# Altium PCB Rf reciever.PcbDoc
Units mm, origin at the board's own origin, x right, y up, seen from the top; angles counter-clockwise.
Board outline 39.24 x 33.15 mm, 2 copper layers (Top Layer, Bottom Layer); 13 components, 14 nets, 49 pads, 0 vias.
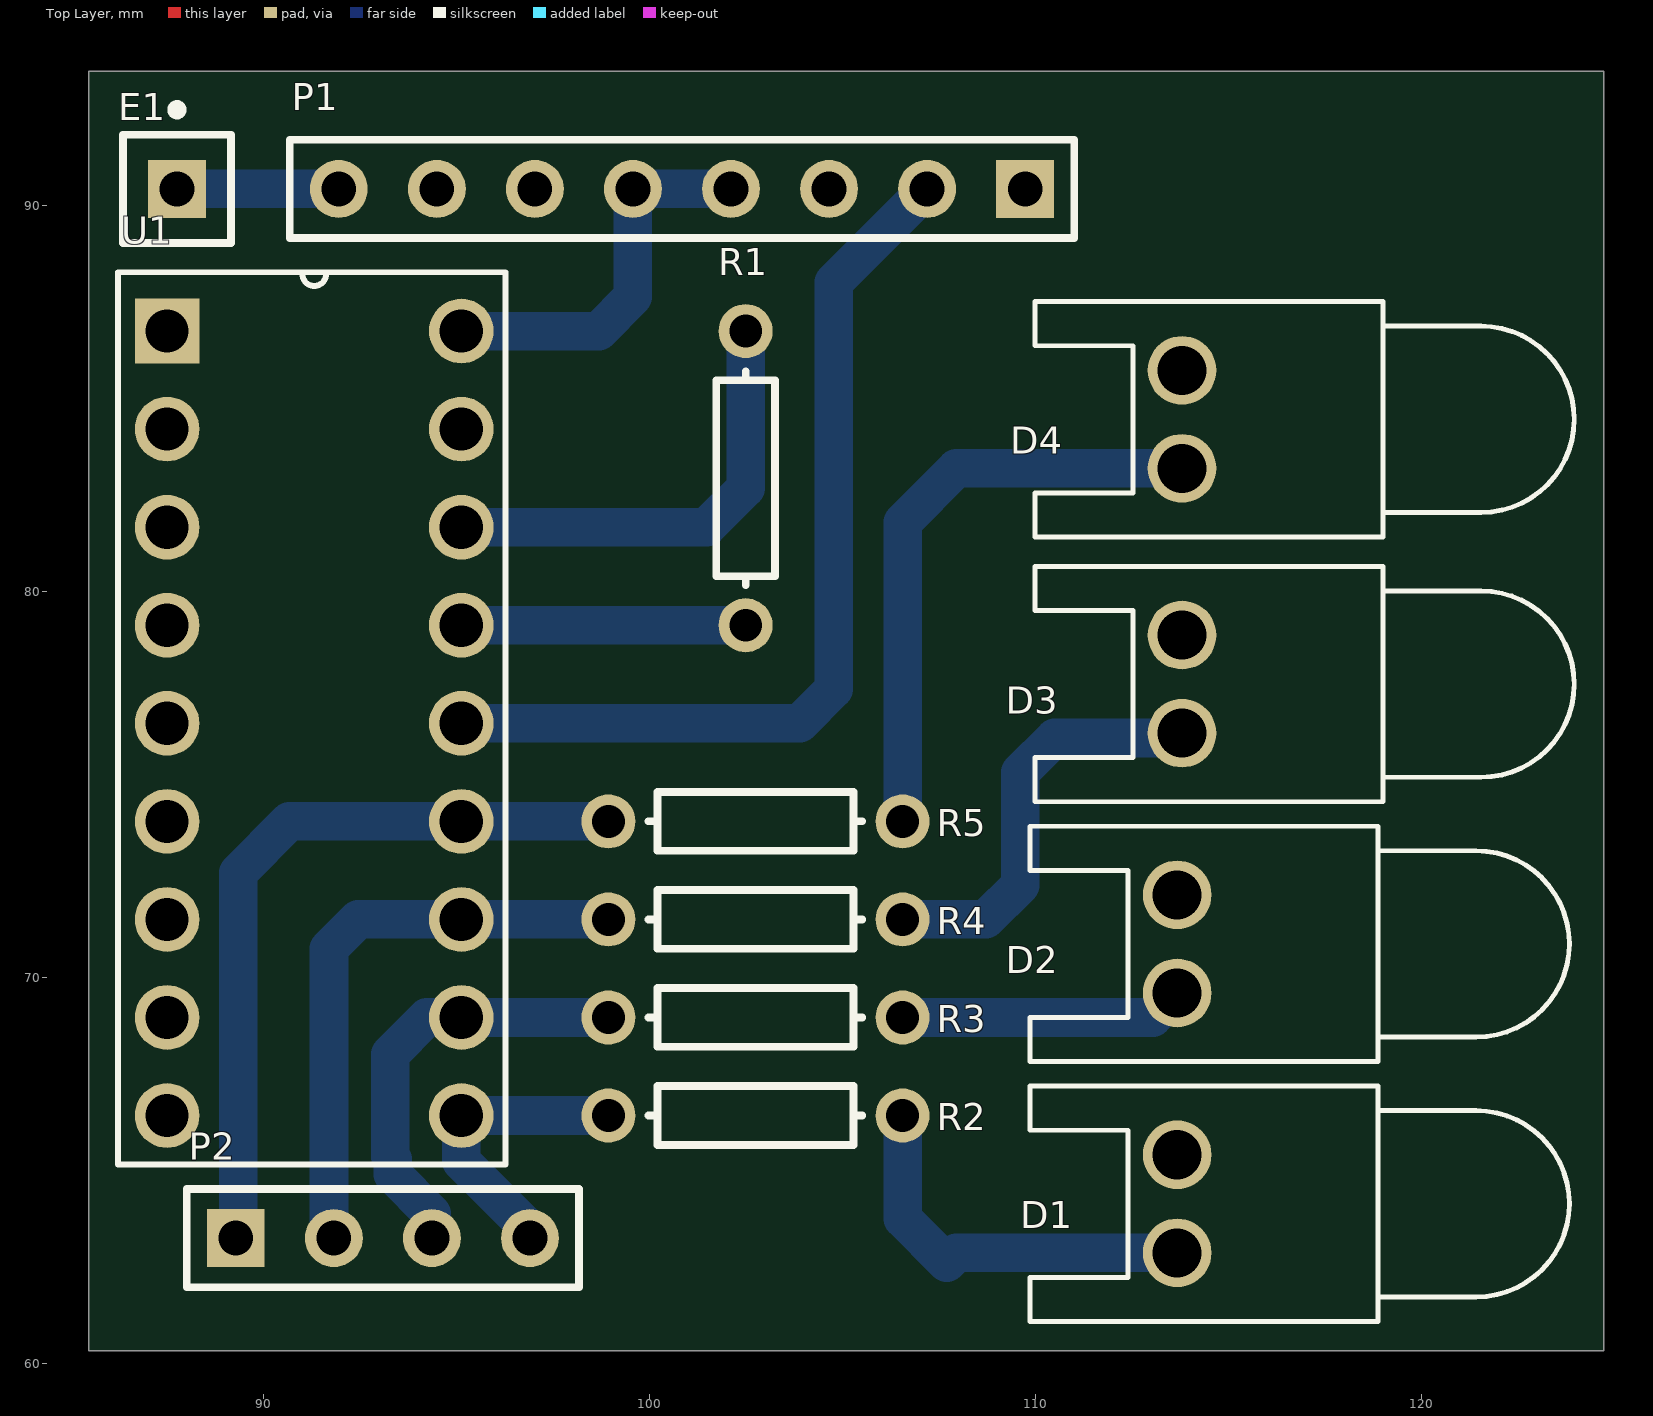
[diagram p0: Top Layer view]
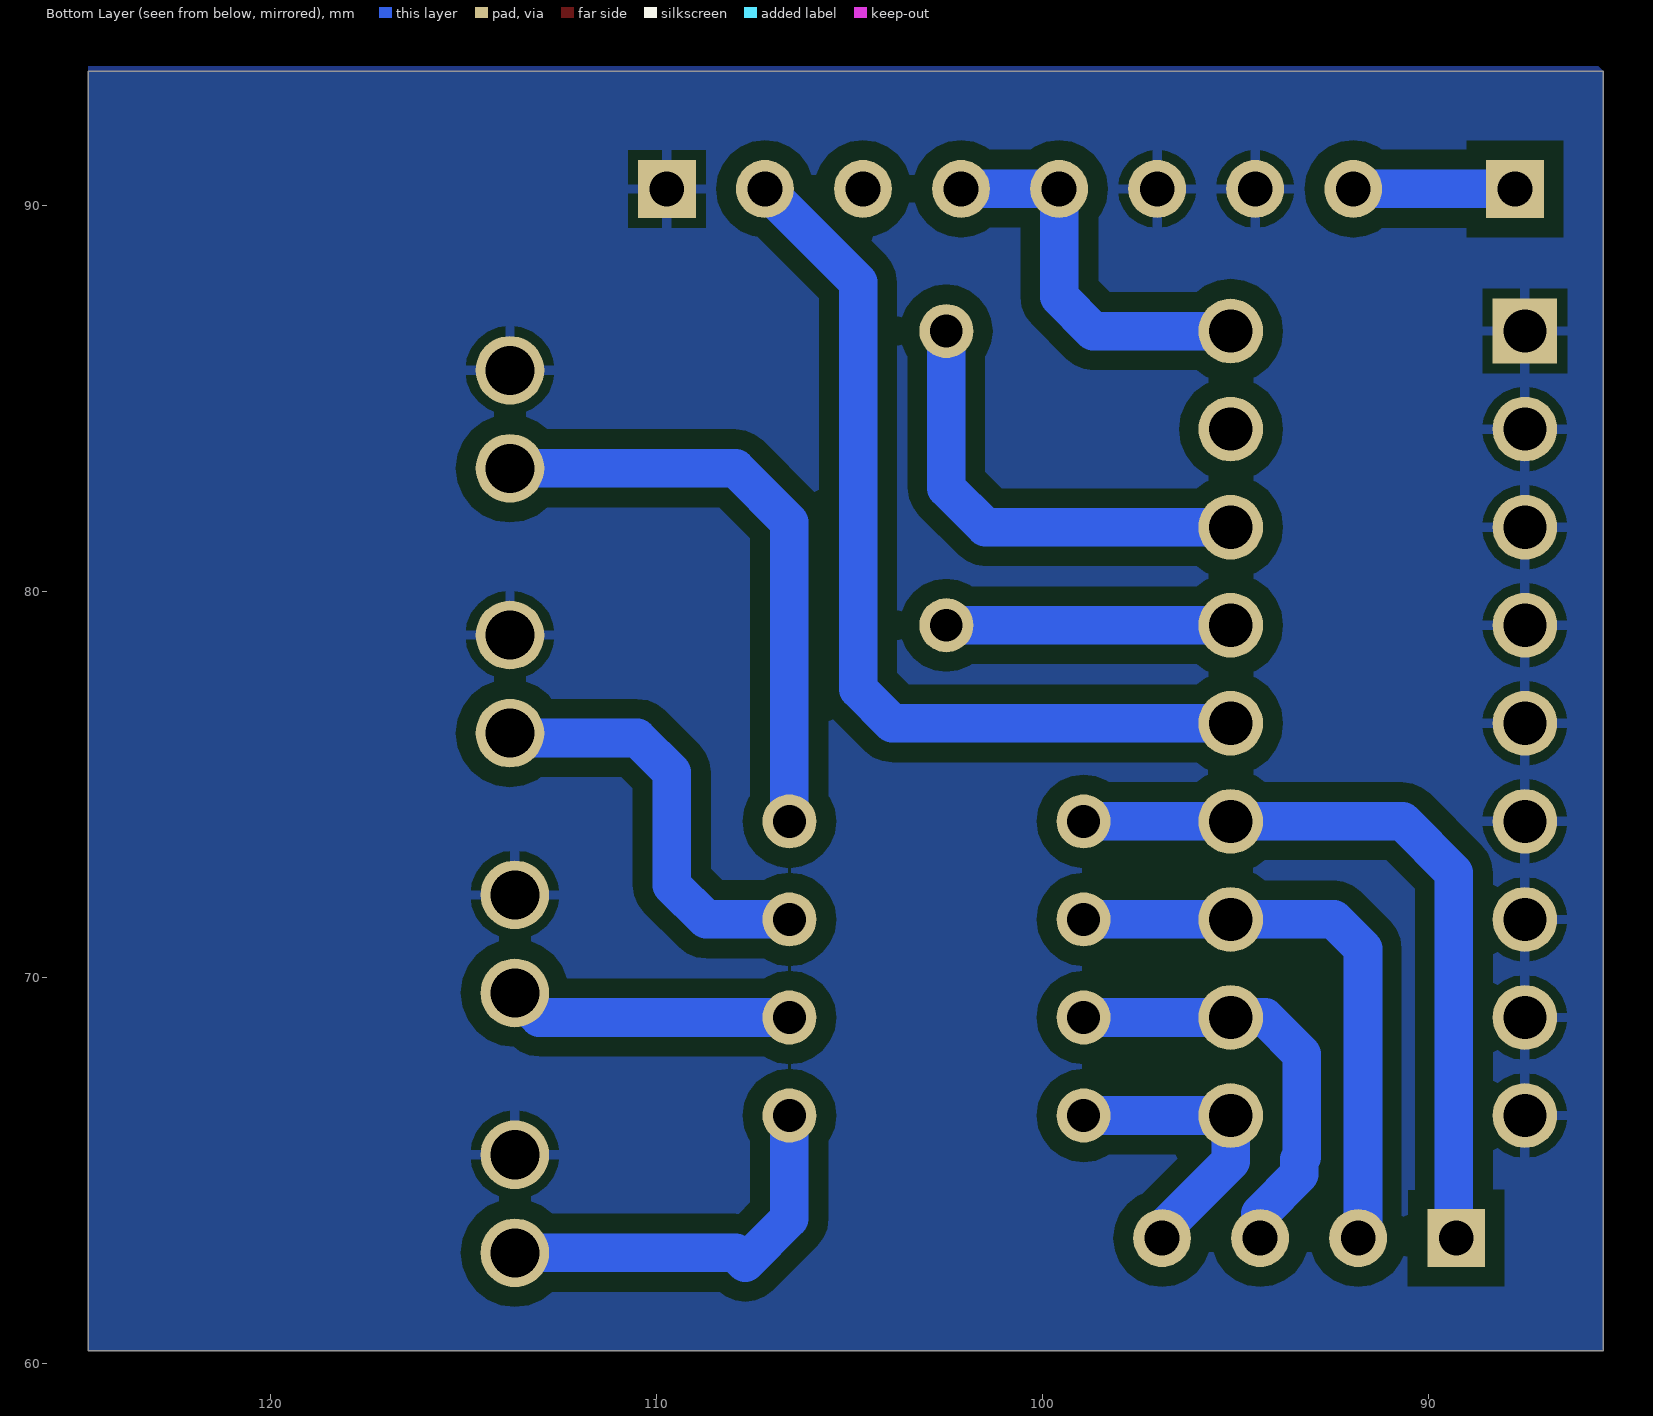
[diagram p1: Bottom Layer view, seen from below]

## Layer stack, top to bottom
Top Solder: solder mask 0.0102, Solder Resist, Dk 3.5
Top Layer: signal copper 0.0356
Dielectric 1: dielectric 0.32, FR-4, Dk 4.8
Bottom Layer: signal copper 0.0356
Bottom Solder: solder mask 0.0102, Solder Resist, Dk 3.5

## Board outline
124.714,93.472 124.714,60.325 85.471,60.325 85.471,93.472

## Design rules (kind name [scope] priority, off if disabled: settings)
Clearance [All] p1: gap=0.5 ignorepadtopadclearanceinfootprint=FALSE
PolygonConnect [All] p1: connectstyle=Relief reliefconductorwidth=0.254 reliefentries=4 polygonreliefangle="90 Angle" airgapwidth=0.254
RoutingVias [All] p1: holewidth=0.711 width=1.27 viastyle="Through Hole" minholewidth=0.711 minwidth=1.27 maxholewidth=0.711 maxwidth=1.27
SolderMaskExpansion [All] p1: expansion=0.102
Width [All] p1: maxlimit=2 minlimit=2539.975 preferedwidth=1 toplayer_minwidth=0 bottomlayer_minwidth=0
30 further rules are at their usual default settings.

## Components (designator, comment, footprint, x,y, rotation, side; value= is the part's Value field where it differs from the comment)
D1 "LED0" LED-0 113.665,64.135 r90 top
D2 "LED0" LED-0 113.665,70.866 r90 top
D3 "LED0" LED-0 113.792,77.597 r90 top
D4 "LED0" LED-0 113.792,84.455 r90 top
E1 "Antenna" PIN1 87.757,90.424 r0 top
P1 "Header 8" HDR1X8 109.728,90.424 r180 top
P2 "Header 4" HDR1X4 89.281,63.246 r0 top
R1 "Res1" AXIAL-0.3 102.489,82.931 r270 top value=1K
R2 "Res1" AXIAL-0.3 102.743,66.421 r0 top value=1K
R3 "Res1" AXIAL-0.3 102.743,68.961 r0 top value=1K
R4 "Res1" AXIAL-0.3 102.743,71.501 r0 top value=1K
R5 "Res1" AXIAL-0.3 102.743,74.041 r0 top value=1K
U1 "HT12D" DIP254P762X342-18 95.123,66.421 r0 top

## Footprints (in the part's own frame and the unit in brackets; to place one, negate y for a bottom-side part, rotate by r counter-clockwise, add the part's x,y. Pads: shape width x height; smd on the part's side, far side on the other; paste and mask are expansions set on the pad)
AXIAL-0.3 [mm] "Axial Device, Thru-Hole; 2 Leads; 0.3 in Pin Spacing"
  round 1.4 hole 0.85: 1(-3.81,0) 2(3.81,0)
  silkscreen extent -2.77,-0.76 2.77,0.76
DIP254P762X342-18 [mil]
  rect 66x66 hole 44: 1(-300,800)
  round 66 hole 44: 2(-300,700) 3(-300,600) 4(-300,500) 5(-300,400) 6(-300,300) 7(-300,200) 8(-300,100) 9(-300,0) 10(0,0) 11(0,100) 12(0,200) 13(0,300) 14(0,400) 15(0,500) 16(0,600) 17(0,700) 18(0,800)
  silkscreen extent -350,-50 45,860
HDR1X4 [mm] "Connector; Header; 4 Position"
  rect 1.5x1.5 hole 0.9: 1(0,0)
  round 1.5 hole 0.9: 2(2.54,0) 3(5.08,0) 4(7.62,0)
  silkscreen extent -1.27,-1.27 8.89,1.27
HDR1X8 [mm] "Connector; Header; 8 Position"
  rect 1.5x1.5 hole 0.9: 1(0,0)
  round 1.5 hole 0.9: 2(2.54,0) 3(5.08,0) 4(7.62,0) 5(10.16,0) 6(12.7,0) 7(15.24,0) 8(17.78,0)
  silkscreen extent -1.27,-1.27 19.05,1.27
LED-0 [mil] "LED; 2 Leads"
  round 70 hole 50: 1(50,0) 2(-50,0)
  silkscreen extent -120,-400 120,150
PIN1 [mm] "Generic Antenna; 1 Lead"
  rect 1.5x1.5 hole 0.9: 1(0,0)
  silkscreen extent -1.4,-1.4 1.4,2.17

## Part data
D1 D2 D3 D4: "Typical INFRARED GaAs LED", LatestRevisionDate=08-Jul-2005, LatestRevisionNote="Mech Layer 1 removed.", PackageDescription="LED; 2 Leads", PackageReference=LED-0, Published=8-Jun-2000, Publisher="Altium Limited"
E1: "Generic Antenna", LatestRevisionDate=17-Jul-2002, LatestRevisionNote="Re-released for DXP Platform.", PackageReference=PIN1, Published=24-Mar-1999, Publisher="Altium Limited"
P1: "Header, 8-Pin", LatestRevisionDate=17-Jul-2002, LatestRevisionNote="Re-released for DXP Platform.", Publisher="Altium Limited"
P2: "Header, 4-Pin", LatestRevisionDate=17-Jul-2002, LatestRevisionNote="Re-released for DXP Platform.", Publisher="Altium Limited"
R1 R2 R3 R4 R5: "Resistor", LatestRevisionDate=17-Jul-2002, LatestRevisionNote="Re-released for DXP Platform.", PackageDescription="Axial Device, Thru-Hole; 2 Leads; 0.3 in Pin Spacing", PackageReference=AXIAL-0.3, Published=8-Jun-2000, Publisher="Altium Limited"
U1: Package="DIP-18 Holtek", Availability=Unavailable, MF=Holtek, MP=HT12D, Price=None, SnapEDA_Link=https://www.snapeda.com/parts/HT12D/Holtek/view-part/53386/?ref=snap

## Nets (pads, with @x,y where several pads share a name; then routed paths per layer and width w, separated by ;. In a path a pad name is that pad's centre, name@x,y a point inside that pad or via, vN(x,y) a via of type N, cw(c..) or ccw(c..) an arc to the next point about the centre after c; other vN are vias at no path point)
+5: P1.4 P1.5 U1.18 | length 10.1
  Bottom Layer w1: U1.18 98.679,86.741 99.568,87.63 P1.5 P1.4
GND: D1.1 D2.1 D3.1 D4.1 P1.1 P1.6 P1.7 U1.1 U1.2 U1.3 U1.4 U1.5 U1.6 U1.7 U1.8 U1.9
NetD1_2: D1.2 R2.2 | length 10.4
  Bottom Layer w1: R2.2 106.553,63.754 107.696,62.611 107.95,62.865 D1.2
NetD2_2: D2.2 R3.2 | length 7.4
  Bottom Layer w1: R3.2 113.03,68.961 D2.2
NetD3_2: D3.2 R4.2 | length 10.9
  Bottom Layer w1: R4.2 108.712,71.501 109.601,72.39 109.601,75.311 110.49,76.2 113.665,76.2 D3.2
NetD4_2: D4.2 R5.2 | length 15.6
  Bottom Layer w1: R5.2 106.553,81.788 107.95,83.185 D4.2
NetE1_1: E1.1 P1.8 | length 4.2
  Bottom Layer w1: E1.1 P1.8
NetP1_2: P1.2 U1.14 | length 24
  Bottom Layer w1: U1.14 103.886,76.581 104.775,77.47 104.775,88.011 P1.2
NetP2_1: P2.1 R5.1 U1.13 | length 19.6
  Bottom Layer w1: P2.1@89.341,63.246 89.341,72.711 90.671,74.041 U1.13 R5.1
NetP2_2: P2.2 R4.1 U1.12 | length 15.1
  Bottom Layer w1: P2.2 91.694,63.373 91.694,70.739 92.456,71.501 U1.12 R4.1
NetP2_3: P2.3 R3.1 U1.11 | length 11.3
  Bottom Layer w1: P2.3 94.361,63.881 93.345,64.897 93.345,65.285 93.285,65.345 93.285,68.012 94.234,68.961 U1.11 R3.1
NetP2_4: P2.4 R2.1 U1.10 | length 7.7
  Bottom Layer w1: P2.4 96.901,63.462 95.123,65.24 U1.10 R2.1
NetR1_1: R1.1 U1.16 | length 11.9
  Bottom Layer w1: U1.16 101.473,81.661 102.489,82.677 R1.1
NetR1_2: R1.2 U1.15 | length 7.4
  Bottom Layer w1: U1.15 R1.2
pads on no net: P1.3 U1.17

## Polygon pours and split planes (outlines as drawn)
GND on Bottom Layer "Bottom Layer-No Net" (solid, pour order 0): 124.714,60.325 85.344,60.325 85.471,60.452 85.471,93.472 124.714,93.472

## Silkscreen, mask and mechanical layers (free items; w line width, h text height)
Mechanical 1:
  lines w0.254: 85.598,93.345 85.598,60.325 124.714,60.325 124.714,93.472 114.935,93.472 95.377,93.472 85.598,93.472